# Altium PCB DSP6748_F.PcbDoc (part 3 of 16)
Units mil, origin at the board's own origin, x right, y up, seen from the top; angles counter-clockwise.
Board outline 8188.98 x 4055.12 mil, 4 copper layers (Top Layer, GND, VCC, Bottom Layer); 409 components, 262 nets, 1424 pads, 350 vias.
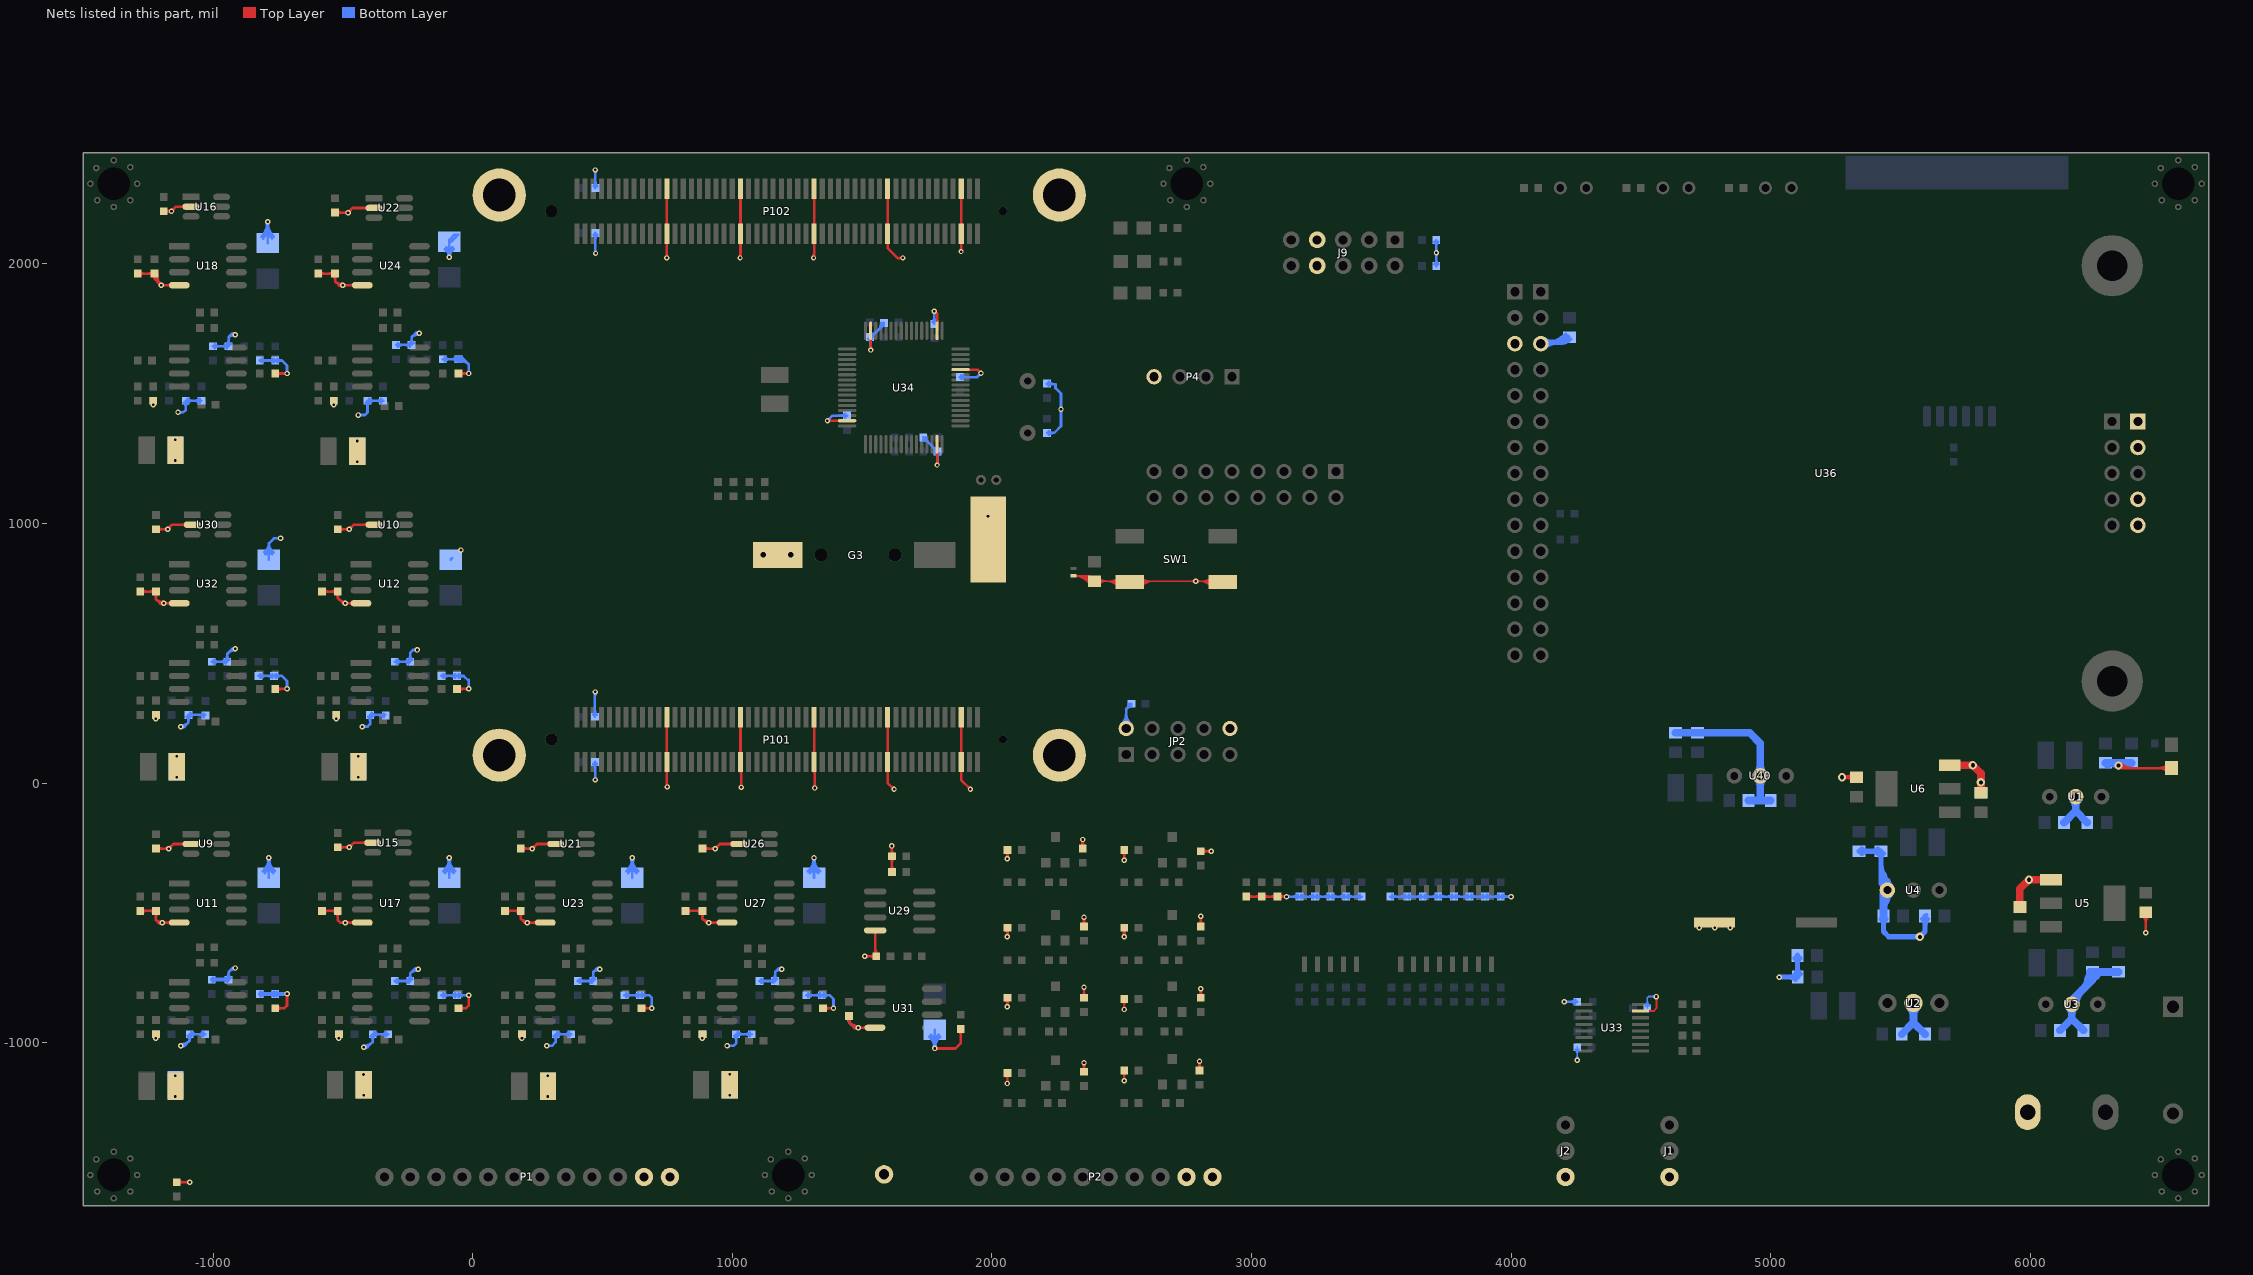
[diagram p5: the nets of this part, all layers, seen from the top]

## Via types
v1: diameter 21, hole 10, Top Layer to Bottom Layer, 244 vias
v2: diameter 20, hole 10, Top Layer to Bottom Layer, 84 vias
v3: diameter 32, hole 16, Top Layer to Bottom Layer, 11 vias
v4: diameter 24, hole 12, Top Layer to Bottom Layer, 7 vias
v5: diameter 39.37, hole 19.68, Top Layer to Bottom Layer, 3 vias
v6: diameter 30, hole 15, Top Layer to Bottom Layer, 1 vias

## Nets (pads, with @x,y where several pads share a name; then routed paths per layer and width w, separated by ;. In a path a pad name is that pad's centre, name@x,y a point inside that pad or via, vN(x,y) a via of type N, cw(c..) or ccw(c..) an arc to the next point about the centre after c; other vN are vias at no path point) (continued)
GND: C1.2 C2.2 C3.2 C4.2 C5.2 C6.2 C7.2 C8.2 C9.2 C10.2 C11.2 C12.2 C13.2 C14.2 C15.2 C16.2 C17.2 C18.2 C19.2 C20.2 C21.2 C22.2 C25.1 C28.1 C29.1 C30.1 C31.1 C32.1 C33.1 C34.1 C35.1 C36.1 C37.1 C38.1 C39.1 C40.1 C41.1 C42.1 C43.1 C44.1 C45.1 C46.1 C47.1 C48.1 C49.1 C50.1 C51.1 C52.2 C53.2 C54.1 C59.1 C60.1 C61.1 C62.1 C63.1 C64.1 C65.1 C66.1 C67.1 C68.1 C69.1 C70.1 C71.1 C72.1 C73.1 C74.1 C75.1 C76.1 C77.1 C78.1 C79.1 C80.1 C81.1 C82.1 C83.1 C84.2 C85.2 C86.1 C91.1 C92.1 C93.1 C94.1 C95.1 C96.1 C97.1 C98.1 C99.1 C100.1 C101.1 C102.1 C103.1 C104.2 C105.1 C106.1 C107.1 C108.1 C109.1 C110.1 C111.1 C112.1 C113.1 C114.1 C115.1 C116.2 C117.2 C119.1 C121.1 C122.1 C123.1 C124.1 C125.1 C126.1 C127.1 C128.1 C129.1 C130.1 C131.1 C132.1 C133.2 C134.1 C137.1 C138.1 C139.1 C140.1 C141.1 C142.1 C143.1 C144.1 C145.1 C146.1 C147.1 C148.1 C149.2 C150.1 C151.1 C152.1 C153.1 C154.1 C155.1 C156.2 C157.1 C158.1 C160.1 C162.2 C163.2 C169.2 C170.2 C180.2 C181.2 C182.2 C183.1 C184.1 C185.1 C186.1 C187.1 C188.1 C189.1 C190.1 C191.1 C192.1 C193.1 C201.2 C202.2 C203.2 C204.2 D7.K DD1.2 G3.2 J1.3 J2.3 J9.7 J9.8 JP2.2 JP2.10 L8.1 P1.11 P1.12 P2.9 P2.10 P3.1 P4.4 P101.23 P101.24 P101.41 P101.42 P101.59 P101.60 P101.77 P101.78 P101.95 P101.96 P102.23 P102.24 P102.41 P102.42 P102.59 P102.60 P102.77 P102.78 P102.95 P102.96 pad.0@102.36,107.36 pad.0@1584.81,-1507.48 pad.1 pad.2 pad.3 R7.1 R8.1 R9.1 R10.1 R19.1 R24.1 R29.1 R30.1 R31.1 R32.1 R41.1 R50.1 R51.1 R52.1 R53.1 R56.1 R63.1 R68.1 R69.1 R74.1 R78.1 R81.1 R82.1 R89.1 R90.1 R124.1 R125.1 R126.1 R127.1 R128.1 R129.1 R130.1 R131.1 R144.1 R145.1 R146.1 R147.1 R148.1 R149.1 R150.1 R151.1 R163.2 R164.2 SW1.3 SW1.4 U1.2 U2.2 U3.2 U4.3 U5.1 U6.3 U9.2 U10.2 U11.4 U12.4 U15.2 U16.2 U17.4 U18.4 U21.2 U22.2 U23.4 U24.4 U26.2 U27.4 U29.4 U30.2 U31.4 U32.4 U33.15 U34.12 U34.18 U34.31 U34.47 U34.63 U36.J1-3 U36.J2-3 U36.J3-1 U36.J3-2 U36.J3-4 U36.J3-5 U40.2 | length 62689.3
  Top Layer w7: v1@2054.86,-857.53 ccw(c2042.91,-845.58) 2059.81,-845.58 ccw(c2076.71,-845.58) v1@2064.76,-857.53 ; v1@2054.86,-587.53 ccw(c2042.91,-575.58) 2059.81,-575.58 ccw(c2076.71,-575.58) v1@2064.76,-587.53 ; v1@2054.86,-287.53 ccw(c2042.91,-275.58) 2059.81,-275.58 ccw(c2076.71,-275.58) v1@2064.76,-287.53 ; v1(2059.81,-1157.48) R19.1@2059.81,-1117.48 ; v1(2059.81,-862.48) R24.1@2059.81,-827.48 ; v1(2059.81,-592.48) R41.1@2059.81,-557.48 ; v1(2059.81,-292.48) R56.1@2059.81,-257.48 ; v1@2344.86,-222.43 cw(c2332.91,-234.38) 2349.81,-234.38 cw(c2366.71,-234.38) v1@2354.76,-222.43 ; C86.1@2349.81,-252.48 v1(2349.81,-217.48) ; v1@2349.86,-1082.43 cw(c2337.91,-1094.38) 2354.81,-1094.38 cw(c2371.71,-1094.38) v1@2359.76,-1082.43 ; v1@2349.86,-522.43 cw(c2337.91,-534.38) 2354.81,-534.38 cw(c2371.71,-534.38) v1@2359.76,-522.43 ; C25.1@2354.81,-1112.48 v1(2354.81,-1077.48) ; C54.1@2354.81,-827.48 v1(2354.81,-787.48) ; C61.1@2354.81,-552.48 v1(2354.81,-517.48) ; v1@2504.86,-587.53 ccw(c2492.91,-575.58) 2509.81,-575.58 ccw(c2526.71,-575.58) v1@2514.76,-587.53 ; v1(2509.81,-1147.48) R63.1@2509.81,-1107.48 ; v1(2509.81,-872.48) R74.1@2509.81,-832.48 ; v1(2509.81,-592.48) R78.1@2509.81,-557.48 ; SW1.4@2885.77,777.52 C5.2@2394.77,777.52 2373.87,798.42 DD1.2@2314.77,798.42 ; U33.15@4499.06,-878.5 4548.79,-878.5 4559.81,-867.48 v1(4559.81,-822.48) ; R19.1@2051.68,-1125.61 cw(c2032.05,-1145.24) 2059.81,-1145.24 ; R19.1@2051.68,-1125.61 cw(c2032.05,-1145.24) 2059.81,-1145.24 ; R19.1@2051.68,-1125.61 cw(c2032.05,-1145.24) 2059.81,-1145.24 ; R24.1@2051.68,-835.61 cw(c2032.05,-855.24) v1@2059.81,-855.24 ; R24.1@2051.68,-835.61 cw(c2032.05,-855.24) v1@2059.81,-855.24 ; R24.1@2051.68,-835.61 cw(c2032.05,-855.24) v1@2059.81,-855.24 ; R41.1@2051.68,-565.61 cw(c2032.05,-585.24) v1@2059.81,-585.24 ; R41.1@2051.68,-565.61 cw(c2032.05,-585.24) v1@2059.81,-585.24 ; R41.1@2051.68,-565.61 cw(c2032.05,-585.24) v1@2059.81,-585.24 ; R56.1@2051.68,-265.61 cw(c2032.05,-285.24) v1@2059.81,-285.24 ; R56.1@2051.68,-265.61 cw(c2032.05,-285.24) v1@2059.81,-285.24 ; R56.1@2051.68,-265.61 cw(c2032.05,-285.24) v1@2059.81,-285.24 ; v1@2054.23,-858.25 ccw(c2041.54,-848.62) 2056.93,-844.5 ; v1@2054.23,-858.25 ccw(c2041.54,-848.62) 2056.93,-844.5 ; v1@2054.23,-858.25 ccw(c2041.54,-848.62) 2056.93,-844.5 ; v1@2054.23,-588.25 ccw(c2041.54,-578.62) 2056.93,-574.5 ; v1@2054.23,-588.25 ccw(c2041.54,-578.62) 2056.93,-574.5 ; v1@2054.23,-588.25 ccw(c2041.54,-578.62) 2056.93,-574.5 ; v1@2054.23,-288.25 ccw(c2041.54,-278.62) 2056.93,-274.5 ; v1@2054.23,-288.25 ccw(c2041.54,-278.62) 2056.93,-274.5 ; v1@2054.23,-288.25 ccw(c2041.54,-278.62) 2056.93,-274.5 ; v1@2054.86,-1152.53 ccw(c2042.91,-1140.58) 2059.81,-1140.58 ; v1@2054.86,-1152.53 ccw(c2042.91,-1140.58) 2059.81,-1140.58 ; v1@2054.86,-1152.53 ccw(c2042.91,-1140.58) 2059.81,-1140.58 ; v1@2056.31,-856.42 ccw(c2051.06,-847.32) 2061.2,-850.04 ; v1@2056.31,-856.42 ccw(c2051.06,-847.32) 2061.2,-850.04 ; v1@2056.31,-856.42 ccw(c2051.06,-847.32) 2061.2,-850.04 ; v1@2056.31,-586.42 ccw(c2051.06,-577.32) 2061.2,-580.04 ; v1@2056.31,-586.42 ccw(c2051.06,-577.32) 2061.2,-580.04 ; v1@2056.31,-586.42 ccw(c2051.06,-577.32) 2061.2,-580.04 ; v1@2056.31,-286.42 ccw(c2051.06,-277.32) 2061.2,-280.04 ; v1@2056.31,-286.42 ccw(c2051.06,-277.32) 2061.2,-280.04 ; v1@2056.31,-286.42 ccw(c2051.06,-277.32) 2061.2,-280.04 ; 2058.42,-850.04 ccw(c2068.56,-847.32) v1@2063.31,-856.42 ; 2058.42,-850.04 ccw(c2068.56,-847.32) v1@2063.31,-856.42 ; 2058.42,-850.04 ccw(c2068.56,-847.32) v1@2063.31,-856.42 ; 2058.42,-580.04 ccw(c2068.56,-577.32) v1@2063.31,-586.42 ; 2058.42,-580.04 ccw(c2068.56,-577.32) v1@2063.31,-586.42 ; 2058.42,-580.04 ccw(c2068.56,-577.32) v1@2063.31,-586.42 ; 2058.42,-280.04 ccw(c2068.56,-277.32) v1@2063.31,-286.42 ; 2058.42,-280.04 ccw(c2068.56,-277.32) v1@2063.31,-286.42 ; 2058.42,-280.04 ccw(c2068.56,-277.32) v1@2063.31,-286.42 ; 2059.81,-1145.24 cw(c2087.57,-1145.24) R19.1@2067.94,-1125.61 ; 2059.81,-1145.24 cw(c2087.57,-1145.24) R19.1@2067.94,-1125.61 ; 2059.81,-1145.24 cw(c2087.57,-1145.24) R19.1@2067.94,-1125.61 ; 2059.81,-1140.58 ccw(c2076.71,-1140.58) v1@2064.76,-1152.53 ; 2059.81,-1140.58 ccw(c2076.71,-1140.58) v1@2064.76,-1152.53 ; 2059.81,-1140.58 ccw(c2076.71,-1140.58) v1@2064.76,-1152.53 ; v1@2059.81,-855.24 cw(c2087.57,-855.24) R24.1@2067.94,-835.61 ; v1@2059.81,-855.24 cw(c2087.57,-855.24) R24.1@2067.94,-835.61 ; v1@2059.81,-855.24 cw(c2087.57,-855.24) R24.1@2067.94,-835.61 ; v1@2059.81,-585.24 cw(c2087.57,-585.24) R41.1@2067.94,-565.61 ; v1@2059.81,-585.24 cw(c2087.57,-585.24) R41.1@2067.94,-565.61 ; v1@2059.81,-585.24 cw(c2087.57,-585.24) R41.1@2067.94,-565.61 ; v1@2059.81,-285.24 cw(c2087.57,-285.24) R56.1@2067.94,-265.61 ; v1@2059.81,-285.24 cw(c2087.57,-285.24) R56.1@2067.94,-265.61 ; v1@2059.81,-285.24 cw(c2087.57,-285.24) R56.1@2067.94,-265.61 ; 2062.69,-844.5 ccw(c2078.08,-848.62) v1@2065.39,-858.25 ; 2062.69,-844.5 ccw(c2078.08,-848.62) v1@2065.39,-858.25 ; 2062.69,-844.5 ccw(c2078.08,-848.62) v1@2065.39,-858.25 ; 2062.69,-574.5 ccw(c2078.08,-578.62) v1@2065.39,-588.25 ; 2062.69,-574.5 ccw(c2078.08,-578.62) v1@2065.39,-588.25 ; 2062.69,-574.5 ccw(c2078.08,-578.62) v1@2065.39,-588.25 ; 2062.69,-274.5 ccw(c2078.08,-278.62) v1@2065.39,-288.25 ; 2062.69,-274.5 ccw(c2078.08,-278.62) v1@2065.39,-288.25 ; 2062.69,-274.5 ccw(c2078.08,-278.62) v1@2065.39,-288.25 ; DD1.2@2314.77,798.42 cw(c2314.77,722.22) C5.2@2376.81,766.48 ; DD1.2@2314.77,798.42 cw(c2314.77,722.22) C5.2@2376.81,766.48 ; DD1.2@2314.77,798.42 cw(c2314.77,722.22) C5.2@2376.81,766.48 ; 2328.37,798.42 cw(c2328.37,731.92) C5.2@2382.5,770.55 ; 2328.37,798.42 cw(c2328.37,731.92) C5.2@2382.5,770.55 ; 2328.37,798.42 cw(c2328.37,731.92) C5.2@2382.5,770.55 ; C86.1@2341.68,-244.35 ccw(c2322.05,-224.72) v1@2349.81,-224.72 ; C86.1@2341.68,-244.35 ccw(c2322.05,-224.72) v1@2349.81,-224.72 ; C86.1@2341.68,-244.35 ccw(c2322.05,-224.72) v1@2349.81,-224.72 ; 2341.96,798.42 cw(c2341.96,741.62) C5.2@2388.2,774.61 ; 2341.96,798.42 cw(c2341.96,741.62) C5.2@2388.2,774.61 ; 2341.96,798.42 cw(c2341.96,741.62) C5.2@2388.2,774.61 ; v1@2344.23,-221.71 cw(c2331.54,-231.34) 2346.93,-235.46 ; v1@2344.23,-221.71 cw(c2331.54,-231.34) 2346.93,-235.46 ; v1@2344.23,-221.71 cw(c2331.54,-231.34) 2346.93,-235.46 ; v1@2346.31,-223.54 cw(c2341.06,-232.64) 2351.2,-229.92 ; v1@2346.31,-223.54 cw(c2341.06,-232.64) 2351.2,-229.92 ; v1@2346.31,-223.54 cw(c2341.06,-232.64) 2351.2,-229.92 ; C25.1@2346.68,-1104.35 ccw(c2327.05,-1084.72) v1@2354.81,-1084.72 ; C25.1@2346.68,-1104.35 ccw(c2327.05,-1084.72) v1@2354.81,-1084.72 ; C25.1@2346.68,-1104.35 ccw(c2327.05,-1084.72) v1@2354.81,-1084.72 ; C54.1@2346.68,-819.35 ccw(c2327.05,-799.72) 2354.81,-799.72 ; C54.1@2346.68,-819.35 ccw(c2327.05,-799.72) 2354.81,-799.72 ; C54.1@2346.68,-819.35 ccw(c2327.05,-799.72) 2354.81,-799.72 ; C61.1@2346.68,-544.35 ccw(c2327.05,-524.72) v1@2354.81,-524.72 ; C61.1@2346.68,-544.35 ccw(c2327.05,-524.72) v1@2354.81,-524.72 ; C61.1@2346.68,-544.35 ccw(c2327.05,-524.72) v1@2354.81,-524.72 ; 2348.42,-229.92 cw(c2358.56,-232.64) v1@2353.31,-223.54 ; 2348.42,-229.92 cw(c2358.56,-232.64) v1@2353.31,-223.54 ; 2348.42,-229.92 cw(c2358.56,-232.64) v1@2353.31,-223.54 ; v1@2349.23,-1081.71 cw(c2336.54,-1091.34) 2351.93,-1095.46 ; v1@2349.23,-1081.71 cw(c2336.54,-1091.34) 2351.93,-1095.46 ; v1@2349.23,-1081.71 cw(c2336.54,-1091.34) 2351.93,-1095.46 ; v1@2349.23,-521.71 cw(c2336.54,-531.34) 2351.93,-535.46 ; v1@2349.23,-521.71 cw(c2336.54,-531.34) 2351.93,-535.46 ; v1@2349.23,-521.71 cw(c2336.54,-531.34) 2351.93,-535.46 ; v1@2349.81,-224.72 ccw(c2377.57,-224.72) C86.1@2357.94,-244.35 ; v1@2349.81,-224.72 ccw(c2377.57,-224.72) C86.1@2357.94,-244.35 ; v1@2349.81,-224.72 ccw(c2377.57,-224.72) C86.1@2357.94,-244.35 ; v1@2349.86,-792.43 cw(c2337.91,-804.38) 2354.81,-804.38 ; v1@2349.86,-792.43 cw(c2337.91,-804.38) 2354.81,-804.38 ; v1@2349.86,-792.43 cw(c2337.91,-804.38) 2354.81,-804.38 ; v1@2351.31,-1083.54 cw(c2346.06,-1092.64) 2356.2,-1089.92 ; v1@2351.31,-1083.54 cw(c2346.06,-1092.64) 2356.2,-1089.92 ; v1@2351.31,-1083.54 cw(c2346.06,-1092.64) 2356.2,-1089.92 ; v1@2351.31,-523.54 cw(c2346.06,-532.64) 2356.2,-529.92 ; v1@2351.31,-523.54 cw(c2346.06,-532.64) 2356.2,-529.92 ; v1@2351.31,-523.54 cw(c2346.06,-532.64) 2356.2,-529.92 ; 2352.69,-235.46 cw(c2368.08,-231.34) v1@2355.39,-221.71 ; 2352.69,-235.46 cw(c2368.08,-231.34) v1@2355.39,-221.71 ; 2352.69,-235.46 cw(c2368.08,-231.34) v1@2355.39,-221.71 ; 2353.42,-1089.92 cw(c2363.56,-1092.64) v1@2358.31,-1083.54 ; 2353.42,-1089.92 cw(c2363.56,-1092.64) v1@2358.31,-1083.54 ; 2353.42,-1089.92 cw(c2363.56,-1092.64) v1@2358.31,-1083.54 ; 2353.42,-529.92 cw(c2363.56,-532.64) v1@2358.31,-523.54 ; 2353.42,-529.92 cw(c2363.56,-532.64) v1@2358.31,-523.54 ; 2353.42,-529.92 cw(c2363.56,-532.64) v1@2358.31,-523.54 ; v1@2354.81,-1084.72 ccw(c2382.57,-1084.72) C25.1@2362.94,-1104.35 ; v1@2354.81,-1084.72 ccw(c2382.57,-1084.72) C25.1@2362.94,-1104.35 ; v1@2354.81,-1084.72 ccw(c2382.57,-1084.72) C25.1@2362.94,-1104.35 ; 2354.81,-804.38 cw(c2371.71,-804.38) v1@2359.76,-792.43 ; 2354.81,-804.38 cw(c2371.71,-804.38) v1@2359.76,-792.43 ; 2354.81,-804.38 cw(c2371.71,-804.38) v1@2359.76,-792.43 ; 2354.81,-799.72 ccw(c2382.57,-799.72) C54.1@2362.94,-819.35 ; 2354.81,-799.72 ccw(c2382.57,-799.72) C54.1@2362.94,-819.35 ; 2354.81,-799.72 ccw(c2382.57,-799.72) C54.1@2362.94,-819.35 ; v1@2354.81,-524.72 ccw(c2382.57,-524.72) C61.1@2362.94,-544.35 ; v1@2354.81,-524.72 ccw(c2382.57,-524.72) C61.1@2362.94,-544.35 ; v1@2354.81,-524.72 ccw(c2382.57,-524.72) C61.1@2362.94,-544.35 ; 2355.56,798.42 cw(c2355.56,751.32) C5.2@2393.9,778.68 ; 2355.56,798.42 cw(c2355.56,751.32) C5.2@2393.9,778.68 ; 2355.56,798.42 cw(c2355.56,751.32) C5.2@2393.9,778.68 ; 2357.69,-1095.46 cw(c2373.08,-1091.34) v1@2360.39,-1081.71 ; 2357.69,-1095.46 cw(c2373.08,-1091.34) v1@2360.39,-1081.71 ; 2357.69,-1095.46 cw(c2373.08,-1091.34) v1@2360.39,-1081.71 ; 2357.69,-535.46 cw(c2373.08,-531.34) v1@2360.39,-521.71 ; 2357.69,-535.46 cw(c2373.08,-531.34) v1@2360.39,-521.71 ; 2357.69,-535.46 cw(c2373.08,-531.34) v1@2360.39,-521.71 ; 2366.24,792.71 ccw(c2373.54,801.58) 2380.6,792.51 cw(c2373.54,801.58) 2366.24,792.71 ; 2366.24,792.71 cw(c2353.95,777.8) 2373.27,777.66 ccw(c2353.95,777.8) 2366.24,792.71 ; 2369.16,798.42 cw(c2369.16,761.02) C5.2@2399.6,782.75 ; 2369.16,798.42 cw(c2369.16,761.02) C5.2@2399.6,782.75 ; 2369.16,798.42 cw(c2369.16,761.02) C5.2@2399.6,782.75 ; C5.2@2405.76,769.03 cw(c2426.24,748.55) 2426.24,777.52 ; C5.2@2405.76,769.03 cw(c2426.24,748.55) 2426.24,777.52 ; C5.2@2405.76,769.03 cw(c2426.24,748.55) 2426.24,777.52 ; C5.2@2405.76,786 ccw(c2426.24,806.49) 2426.24,777.52 ; C5.2@2405.76,786 ccw(c2426.24,806.49) 2426.24,777.52 ; C5.2@2405.76,786 ccw(c2426.24,806.49) 2426.24,777.52 ; C5.2@2410.71,764.08 cw(c2443.14,731.65) 2443.14,777.52 ; C5.2@2410.71,764.08 cw(c2443.14,731.65) 2443.14,777.52 ; C5.2@2410.71,764.08 cw(c2443.14,731.65) 2443.14,777.52 ; C5.2@2410.71,790.95 ccw(c2443.14,823.39) 2443.14,777.52 ; C5.2@2410.71,790.95 ccw(c2443.14,823.39) 2443.14,777.52 ; C5.2@2410.71,790.95 ccw(c2443.14,823.39) 2443.14,777.52 ; 2437.38,777.52 cw(c2437.38,707.63) SW1.3@2486.8,757.05 ; 2437.38,777.52 cw(c2437.38,707.63) SW1.3@2486.8,757.05 ; 2437.38,777.52 cw(c2437.38,707.63) SW1.3@2486.8,757.05 ; 2454.28,777.52 cw(c2454.28,724.53) SW1.3@2491.75,762 ; 2454.28,777.52 ccw(c2454.28,823.51) SW1.3@2486.8,790.99 ; 2454.28,777.52 cw(c2454.28,724.53) SW1.3@2491.75,762 ; 2454.28,777.52 ccw(c2454.28,823.51) SW1.3@2486.8,790.99 ; 2454.28,777.52 ccw(c2454.28,823.51) SW1.3@2486.8,790.99 ; 2454.28,777.52 cw(c2454.28,724.53) SW1.3@2491.75,762 ; 2471.18,777.52 cw(c2471.18,741.43) SW1.3@2496.7,766.95 ; 2471.18,777.52 ccw(c2471.18,806.61) SW1.3@2491.75,786.04 ; 2471.18,777.52 cw(c2471.18,741.43) SW1.3@2496.7,766.95 ; 2471.18,777.52 ccw(c2471.18,806.61) SW1.3@2491.75,786.04 ; 2471.18,777.52 ccw(c2471.18,806.61) SW1.3@2491.75,786.04 ; 2471.18,777.52 cw(c2471.18,741.43) SW1.3@2496.7,766.95 ; R63.1@2501.68,-1115.61 cw(c2482.05,-1135.24) 2509.81,-1135.24 ; R63.1@2501.68,-1115.61 cw(c2482.05,-1135.24) 2509.81,-1135.24 ; R63.1@2501.68,-1115.61 cw(c2482.05,-1135.24) 2509.81,-1135.24 ; R74.1@2501.68,-840.61 cw(c2482.05,-860.24) 2509.81,-860.24 ; R74.1@2501.68,-840.61 cw(c2482.05,-860.24) 2509.81,-860.24 ; R74.1@2501.68,-840.61 cw(c2482.05,-860.24) 2509.81,-860.24 ; R78.1@2501.68,-565.61 cw(c2482.05,-585.24) v1@2509.81,-585.24 ; R78.1@2501.68,-565.61 cw(c2482.05,-585.24) v1@2509.81,-585.24 ; R78.1@2501.68,-565.61 cw(c2482.05,-585.24) v1@2509.81,-585.24 ; v1@2504.23,-588.25 ccw(c2491.54,-578.62) 2506.93,-574.5 ; v1@2504.23,-588.25 ccw(c2491.54,-578.62) 2506.93,-574.5 ; v1@2504.23,-588.25 ccw(c2491.54,-578.62) 2506.93,-574.5 ; v1@2504.86,-1142.53 ccw(c2492.91,-1130.58) 2509.81,-1130.58 ; v1@2504.86,-1142.53 ccw(c2492.91,-1130.58) 2509.81,-1130.58 ; v1@2504.86,-1142.53 ccw(c2492.91,-1130.58) 2509.81,-1130.58 ; v1@2504.86,-867.53 ccw(c2492.91,-855.58) 2509.81,-855.58 ; v1@2504.86,-867.53 ccw(c2492.91,-855.58) 2509.81,-855.58 ; v1@2504.86,-867.53 ccw(c2492.91,-855.58) 2509.81,-855.58 ; v1@2506.31,-586.42 ccw(c2501.06,-577.32) 2511.2,-580.04 ; v1@2506.31,-586.42 ccw(c2501.06,-577.32) 2511.2,-580.04 ; v1@2506.31,-586.42 ccw(c2501.06,-577.32) 2511.2,-580.04 ; 2508.42,-580.04 ccw(c2518.56,-577.32) v1@2513.31,-586.42 ; 2508.42,-580.04 ccw(c2518.56,-577.32) v1@2513.31,-586.42 ; 2508.42,-580.04 ccw(c2518.56,-577.32) v1@2513.31,-586.42 ; 2509.81,-1135.24 cw(c2537.57,-1135.24) R63.1@2517.94,-1115.61 ; 2509.81,-1135.24 cw(c2537.57,-1135.24) R63.1@2517.94,-1115.61 ; 2509.81,-1135.24 cw(c2537.57,-1135.24) R63.1@2517.94,-1115.61 ; 2509.81,-1130.58 ccw(c2526.71,-1130.58) v1@2514.76,-1142.53 ; 2509.81,-1130.58 ccw(c2526.71,-1130.58) v1@2514.76,-1142.53 ; 2509.81,-1130.58 ccw(c2526.71,-1130.58) v1@2514.76,-1142.53 ; 2509.81,-860.24 cw(c2537.57,-860.24) R74.1@2517.94,-840.61 ; 2509.81,-860.24 cw(c2537.57,-860.24) R74.1@2517.94,-840.61 ; 2509.81,-860.24 cw(c2537.57,-860.24) R74.1@2517.94,-840.61 ; 2509.81,-855.58 ccw(c2526.71,-855.58) v1@2514.76,-867.53 ; 2509.81,-855.58 ccw(c2526.71,-855.58) v1@2514.76,-867.53 ; 2509.81,-855.58 ccw(c2526.71,-855.58) v1@2514.76,-867.53 ; v1@2509.81,-585.24 cw(c2537.57,-585.24) R78.1@2517.94,-565.61 ; v1@2509.81,-585.24 cw(c2537.57,-585.24) R78.1@2517.94,-565.61 ; v1@2509.81,-585.24 cw(c2537.57,-585.24) R78.1@2517.94,-565.61 ; 2512.69,-574.5 ccw(c2528.08,-578.62) v1@2515.39,-588.25 ; 2512.69,-574.5 ccw(c2528.08,-578.62) v1@2515.39,-588.25 ; 2512.69,-574.5 ccw(c2528.08,-578.62) v1@2515.39,-588.25 ; SW1.3@2565.84,766.95 cw(c2591.36,741.43) 2591.36,777.52 ; SW1.3@2565.84,766.95 cw(c2591.36,741.43) 2591.36,777.52 ; SW1.3@2565.84,766.95 cw(c2591.36,741.43) 2591.36,777.52 ; SW1.3@2570.79,762 cw(c2608.26,724.53) 2608.26,777.52 ; SW1.3@2570.79,762 cw(c2608.26,724.53) 2608.26,777.52 ; SW1.3@2570.79,762 cw(c2608.26,724.53) 2608.26,777.52 ; SW1.3@2570.79,786.04 ccw(c2591.36,806.61) 2591.36,777.52 ; SW1.3@2570.79,786.04 ccw(c2591.36,806.61) 2591.36,777.52 ; SW1.3@2570.79,786.04 ccw(c2591.36,806.61) 2591.36,777.52 ; SW1.3@2575.74,757.05 cw(c2625.16,707.63) 2625.16,777.52 ; SW1.3@2575.74,757.05 cw(c2625.16,707.63) 2625.16,777.52 ; SW1.3@2575.74,757.05 cw(c2625.16,707.63) 2625.16,777.52 ; SW1.3@2575.74,790.99 ccw(c2608.26,823.51) 2608.26,777.52 ; SW1.3@2575.74,790.99 ccw(c2608.26,823.51) 2608.26,777.52 ; SW1.3@2575.74,790.99 ccw(c2608.26,823.51) 2608.26,777.52 ; 2767.87,777.52 cw(c2767.87,760.62) v1@2779.82,772.57 ; 2767.87,777.52 ccw(c2767.87,794.42) v1@2779.82,782.47 ; 2767.87,777.52 cw(c2767.87,760.62) v1@2779.82,772.57 ; 2767.87,777.52 ccw(c2767.87,794.42) v1@2779.82,782.47 ; 2767.87,777.52 ccw(c2767.87,794.42) v1@2779.82,782.47 ; 2767.87,777.52 cw(c2767.87,760.62) v1@2779.82,772.57 ; v1@2789.72,772.57 cw(c2801.67,760.62) 2801.67,777.52 ; v1@2789.72,772.57 cw(c2801.67,760.62) 2801.67,777.52 ; v1@2789.72,772.57 cw(c2801.67,760.62) 2801.67,777.52 ; v1@2789.72,782.47 ccw(c2801.67,794.42) 2801.67,777.52 ; v1@2789.72,782.47 ccw(c2801.67,794.42) 2801.67,777.52 ; v1@2789.72,782.47 ccw(c2801.67,794.42) 2801.67,777.52 ; 2795.38,777.52 cw(c2795.38,707.63) SW1.4@2844.8,757.05 ; 2795.38,777.52 cw(c2795.38,707.63) SW1.4@2844.8,757.05 ; 2795.38,777.52 cw(c2795.38,707.63) SW1.4@2844.8,757.05 ; 2812.28,777.52 cw(c2812.28,724.53) SW1.4@2849.75,762 ; 2812.28,777.52 ccw(c2812.28,823.51) SW1.4@2844.8,790.99 ; 2812.28,777.52 cw(c2812.28,724.53) SW1.4@2849.75,762 ; 2812.28,777.52 ccw(c2812.28,823.51) SW1.4@2844.8,790.99 ; 2812.28,777.52 ccw(c2812.28,823.51) SW1.4@2844.8,790.99 ; 2812.28,777.52 cw(c2812.28,724.53) SW1.4@2849.75,762 ; 2829.18,777.52 cw(c2829.18,741.43) SW1.4@2854.7,766.95 ; 2829.18,777.52 ccw(c2829.18,806.61) SW1.4@2849.75,786.04 ; 2829.18,777.52 cw(c2829.18,741.43) SW1.4@2854.7,766.95 ; 2829.18,777.52 ccw(c2829.18,806.61) SW1.4@2849.75,786.04 ; 2829.18,777.52 ccw(c2829.18,806.61) SW1.4@2849.75,786.04 ; 2829.18,777.52 cw(c2829.18,741.43) SW1.4@2854.7,766.95 ; v1@4554.86,-827.43 cw(c4542.91,-839.38) 4559.81,-839.38 ; v1@4554.86,-827.43 cw(c4542.91,-839.38) 4559.81,-839.38 ; v1@4554.86,-827.43 cw(c4542.91,-839.38) 4559.81,-839.38 ; 4559.81,-839.38 cw(c4576.71,-839.38) v1@4564.76,-827.43 ; 4559.81,-839.38 cw(c4576.71,-839.38) v1@4564.76,-827.43 ; 4559.81,-839.38 cw(c4576.71,-839.38) v1@4564.76,-827.43 ; DD1.2@2322.69,799.71 ccw(c2331.23,805.16) 2329.05,795.27 cw(c2331.23,805.16) DD1.2@2322.69,799.71 ; 2357.68,791 ccw(c2368.25,803.84) 2379.46,791.55 cw(c2368.25,803.84) 2357.68,791 ; 2363.91,785.87 ccw(c2373.75,797.81) 2384.18,786.38 cw(c2373.75,797.81) 2363.91,785.87